# Altium PCB Joystick.PcbDoc
Units mm, origin at the board's own origin, x right, y up, seen from the top; angles counter-clockwise.
Board outline 200 x 100 mm, 2 copper layers (Top Layer, Bottom Layer); 84 components, 70 nets, 420 pads, 0 vias.
Unrouted connection lines stored in the file: 5.
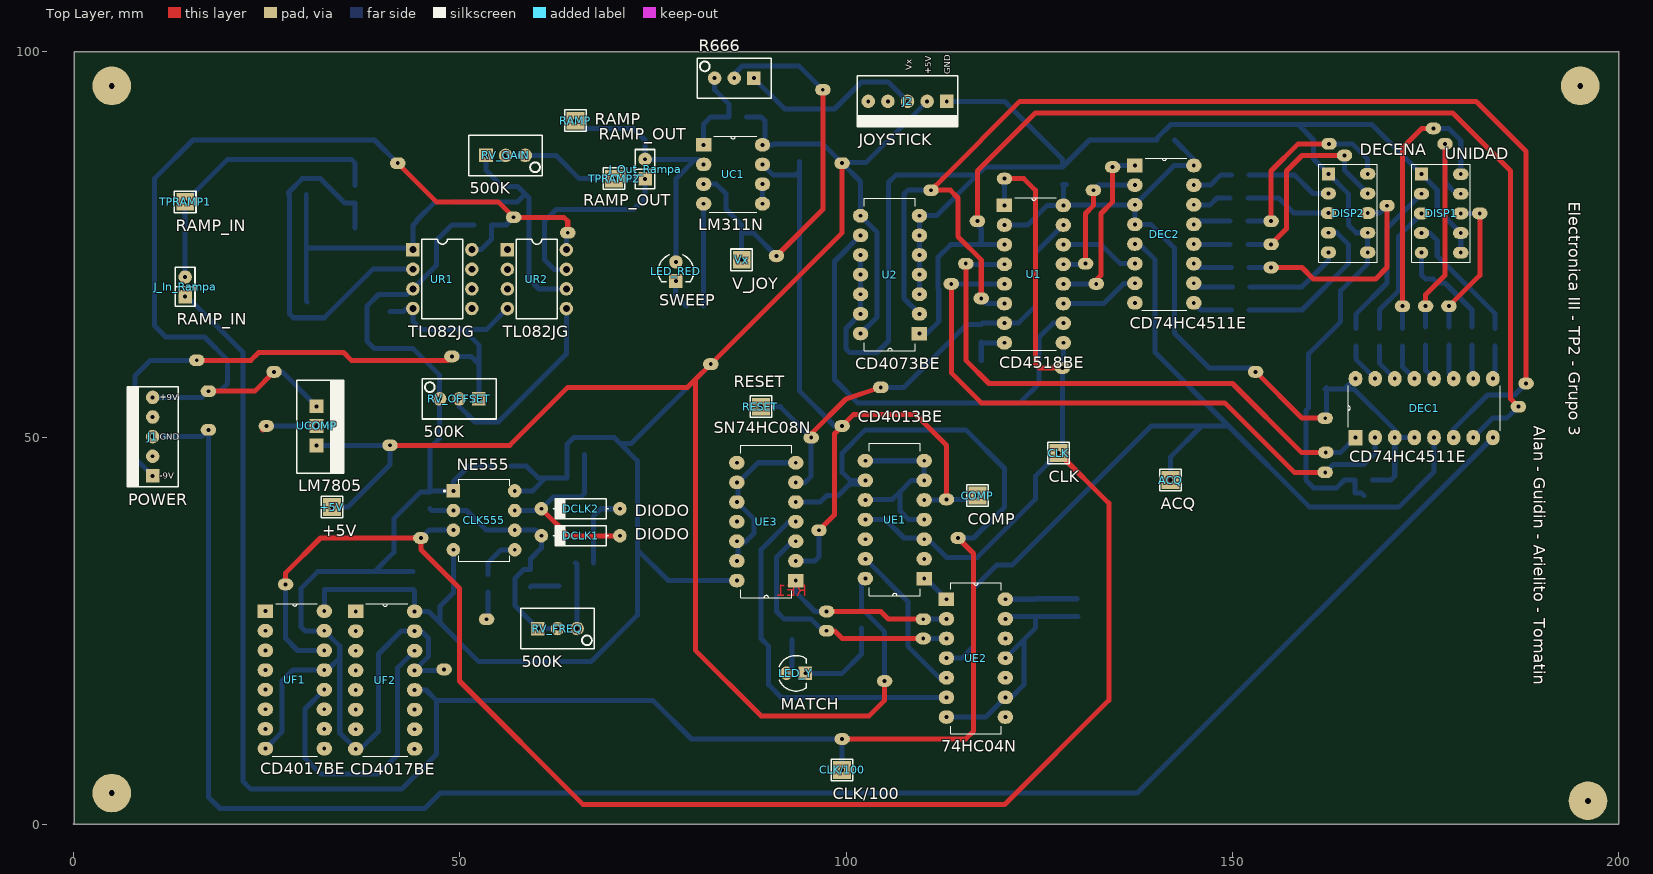
[diagram p0: Top Layer view]
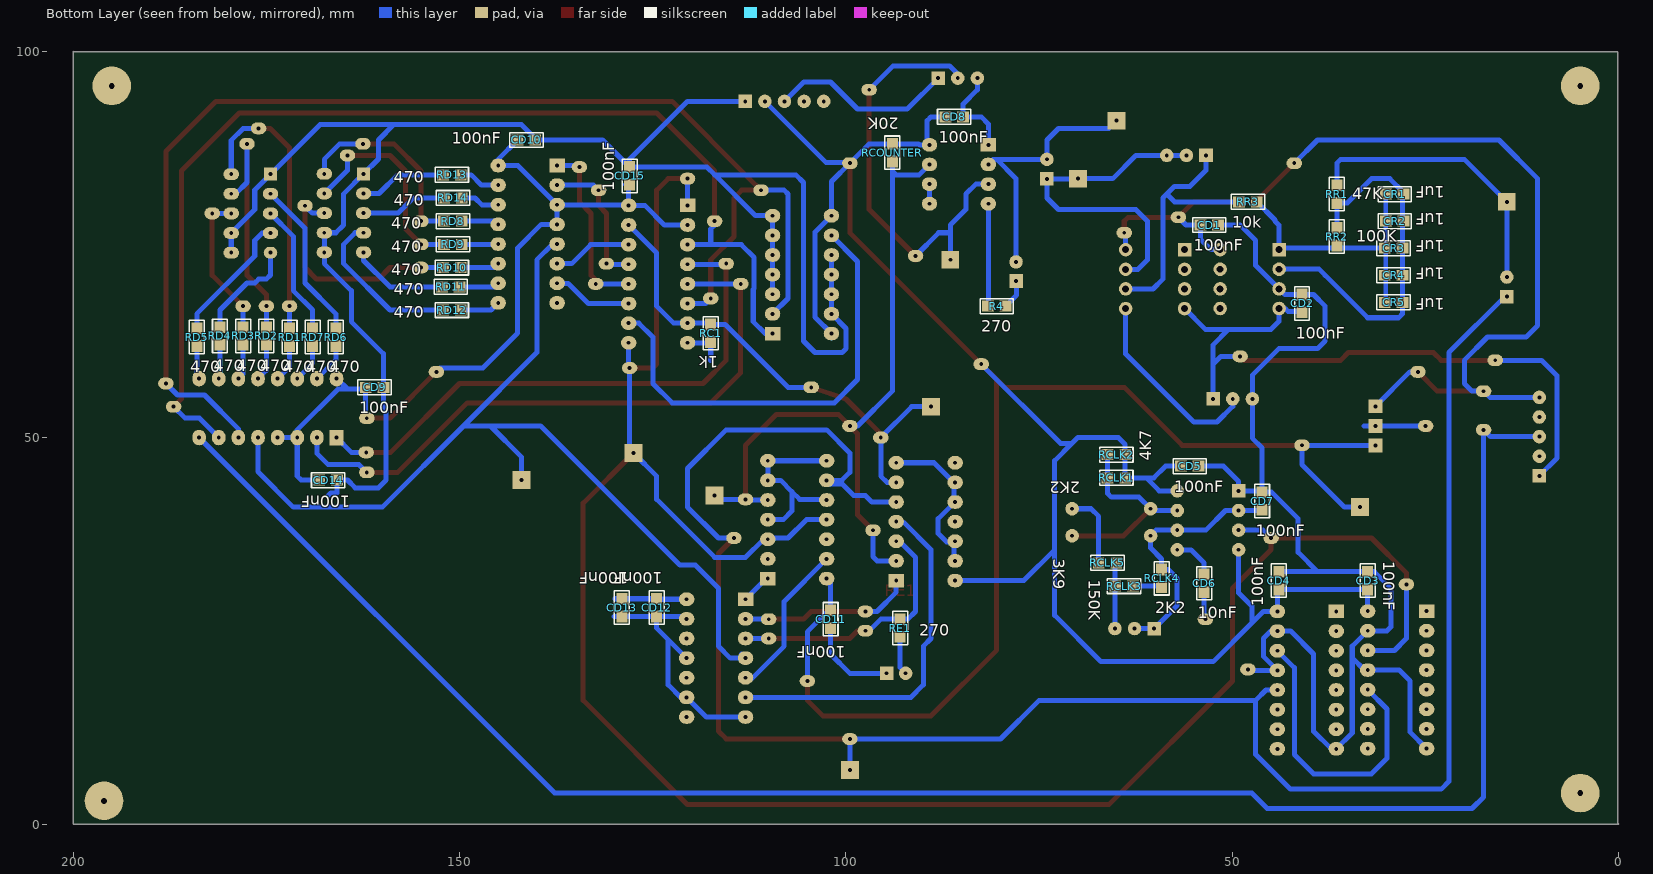
[diagram p1: Bottom Layer view, seen from below]

## Layer stack, top to bottom
Top Solder: solder mask 0.0102, Solder Resist, Dk 3.5
Top Layer: signal copper 0.0356
Dielectric 1: dielectric 0.32, FR-4, Dk 4.8
Bottom Layer: signal copper 0.0356
Bottom Solder: solder mask 0.0102, Solder Resist, Dk 3.5

## Board outline
200,0 200,100 199.949,99.949 0.127,99.949 0.127,0.127 0,0

## Design rules (kind name [scope] priority, off if disabled: settings)
Clearance polygon_Clearance [InPolygon] p1: gap=0.4 ignorepadtopadclearanceinfootprint=FALSE
Clearance [All] p2: gap=0.4 ignorepadtopadclearanceinfootprint=FALSE
PolygonConnect [All] p1: connectstyle=Relief reliefconductorwidth=0.254 reliefentries=4 polygonreliefangle="90 Angle" airgapwidth=0.254
RoutingVias [All] p1: holewidth=0.5 width=2 viastyle="Through Hole" minholewidth=0.5 minwidth=2 maxholewidth=0.5 maxwidth=2
SolderMaskExpansion [All] p1: expansion=0.102
Width [All] p1: maxlimit=0.7 minlimit=0.6 preferedwidth=0.65
30 further rules are at their usual default settings.

## Classes and differential pairs
component class Main: +5V ACQ CLK CLK/100 COMP J1 J2 LED_RED R4 R666 RAMP RESET Vx
component class U_99Counter: CD14 CD15 RC1 U1 U2
component class U_bcd2seven+display: CD9 CD10 DEC1 DEC2 DISP1 DISP2 RD1 RD2 RD3 RD4 RD5 RD6 RD7 RD8 RD9 RD10 RD11 RD12 RD13 RD14
component class U_ClockGen: CD5 CD6 CD7 CLK555 DCLK1 DCLK2 RCLK1 RCLK2 RCLK3 RCLK4 RCLK5 RV_FREQ
component class U_Comparator: CD8 RCOUNTER UC1
component class U_EdgeDetector: CD11 CD12 CD13 LED_Y RE1 UE1 UE2 UE3
component class U_FrequencyDivider: CD3 CD4 UF1 UF2
component class U_InputDriver: UCOMP
component class U_Rampa: CD1 CD2 CR1 CR2 CR3 CR4 CR5 J_In_Rampa J_Out_Rampa RR1 RR2 RR3 RV_GAIN RV_OFFSET TPRAMP1 TPRAMP2 UR1 UR2

## Components (designator, comment, footprint, x,y, rotation, side; value= is the part's Value field where it differs from the comment)
+5V "+5V" TPTH 33.5,41 r0 top
ACQ "ACQ" TPTH 142,44.5 r0 top
CD1 "100nF" 0805 53,77.5 r180 bottom
CD2 "100nF" 0805 41,67.357 r90 bottom
CD3 "100nF" 0805 32.5,31.5 r270 bottom
CD4 "100nF" 0805 44,31.5 r270 bottom
CD5 "100nF" 0805 55.526,46.29 r180 bottom
CD6 "10nF" 0805 53.669,31.147 r270 bottom
CD7 "100nF" 0805 46.169,41.79 r90 bottom
CD8 "100nF" 0805 86,91.5 r180 bottom
CD9 "100nF" 0805 161,56.5 r180 bottom
CD10 "100nF" 0805 141.357,88.5 r180 bottom
CD11 "100nF" 0805 102,26.5 r270 bottom
CD12 "100nF" 0805 124.5,28 r270 bottom
CD13 "100nF" 0805 129,28 r270 bottom
CD14 "100nF" 0805 167,44.5 r180 bottom
CD15 "100nF" 0805 128,83.857 r90 bottom
CLK "CLK" TPTH 127.5,48 r0 top
CLK555 "NE555" *DIP794W45P254L1060H508Q8 53.169,39.29 r0 top
CLK/100 "CLK/100" TPTH 99.5,7 r0 top
COMP "COMP" TPTH 117,42.5 r0 top
CR1 "1uF" 0805 29,81.5 r0 bottom
CR2 "1uF" 0805 29,78 r0 bottom
CR3 "1uF" 0805 29.143,74.5 r0 bottom
CR4 "1uF" 0805 29.143,71 r0 bottom
CR5 "1uF" 0805 29.143,67.5 r0 bottom
DCLK1 "DIODO" DO41 65.669,37.29 r180 top
DCLK2 "DIODO" DO41 65.669,40.79 r180 top
DEC1 "CD74HC4511E" *DIP254P762X508-16 183.7,57.62 r90 top
DEC2 "CD74HC4511E" *DIP254P762X508-16 145,67.42 r0 top
DISP1 "UNIDAD" "DISPLAY_LED_0.3\""#1 177,79 r0 top
DISP2 "DECENA" "DISPLAY_LED_0.3\""#2 164.96,79.04 r0 top
J1 "POWER" MOLEX5 10.294,45.04 r90 top
J2 "JOYSTICK" MOLEX5 113.04,93.5 r180 top
J_In_Rampa "RAMP_IN" JUMPER2 14.5,69.5 r90 top
J_Out_Rampa "RAMP_OUT" JUMPER2 74,84.73 r90 top
LED_RED "SWEEP" LED3 78,71.5 r270 top
LED_Y "MATCH" LED3 93.5,19.5 r0 top
R4 "270" 0805 80.5,67 r0 bottom
R666 "PRESET" "PRESET V" 85.54,96.5 r180 top
RAMP "RAMP" TPTH 65,91 r0 top
RC1 "1k" 0805 117.5,63.5 r90 bottom
RCLK1 "2K2" 0805 65.026,44.79 r180 bottom
RCLK2 "4K7" 0805 65.026,47.79 r0 bottom
RCLK3 "150K" 0805 64.026,30.79 r180 bottom
RCLK4 "2K2" 0805 59.169,31.79 r90 bottom
RCLK5 "3K9" 0805 66.169,33.79 r180 bottom
RCOUNTER "20K" 0805 94,86.857 r270 bottom
RD1 "470" 0805 172,63 r90 bottom
RD2 "470" 0805 175,63.143 r90 bottom
RD3 "470" 0805 178,63.143 r90 bottom
RD4 "470" 0805 181,63.143 r90 bottom
RD5 "470" 0805 184,63 r90 bottom
RD6 "470" 0805 166,63 r90 bottom
RD7 "470" 0805 169,63 r90 bottom
RD8 "470" 0805 150.857,78 r0 bottom
RD9 "470" 0805 150.857,75 r0 bottom
RD10 "470" 0805 151,72 r0 bottom
RD11 "470" 0805 151.143,69.5 r0 bottom
RD12 "470" 0805 151,66.5 r0 bottom
RD13 "470" 0805 151,84 r0 bottom
RD14 "470" 0805 150.857,81 r0 bottom
RE1 "270" 0805 93,25.357 r90 bottom
RESET "RESET" TPTH 89,54 r0 top
RR1 "47K" 0805 36.5,81.5 r270 bottom
RR2 "100K" 0805 36.5,76 r270 bottom
RR3 "10k" 0805 48,80.5 r0 bottom
RV_FREQ "500K" "PRESET V" 62.669,25.29 r0 top
RV_GAIN "500K" "PRESET V" 55.96,86.5 r0 top
RV_OFFSET "500K" "PRESET V" 49.96,55 r180 top
TPRAMP1 "RAMP_IN" TPTH 14.5,80.5 r0 top
TPRAMP2 "RAMP_OUT" TPTH 70,83.5 r90 top
U1 "CD4518BE" *DIP254P762X508-16 128.12,62.26 r0 top
U2 "CD4073BE" *DIP254P762X508-14 101.88,78.7 r180 top
UC1 "LM311N" *DIP254P762X480-8 89.198,80.253 r0 top
UCOMP "LM7805" "TO-220 V" 31.5,51.5 r270 top
UE1 "CD4013BE" *DIP254P762X508-14 102.5,47 r180 top
UE2 "74HC04N" *DIP254P762X420-14 120.62,13.84 r0 top
UE3 "SN74HC08N" *DIP254P762X508-14 85.88,46.74 r180 top
UF1 "CD4017BE" *DIP254P762X508-16 32.5,9.76 r0 top
UF2 "CD4017BE" *DIP254P762X508-16 44.186,9.72 r0 top
UR1 "TL082JG" JG008 47.778,70.509 r270 top
UR2 "TL082JG" JG008 60,70.5 r270 top
Vx "V_JOY" TPTH 86.5,73 r0 top

## Footprints (in the part's own frame and the unit in brackets; to place one, negate y for a bottom-side part, rotate by r counter-clockwise, add the part's x,y. Pads: shape width x height; smd on the part's side, far side on the other; paste and mask are expansions set on the pad)
0805 [mil] "Pasivo 0805"
  rect 60x56 smd: 1(-45,0) 2(45,0)
  silkscreen extent -85,-38 85,38, body extent -40,-25 39,25, height 15
*DIP254P762X420-14 [mm]
  rect 2x1.75 hole 0.5: 1(-7.62,15.24)
  oval 2x1.75 hole 0.5: 2(-7.62,12.7) 3(-7.62,10.16) 4(-7.62,7.62) 5(-7.62,5.08) 6(-7.62,2.54) 7(-7.62,0) 8(0,0) 9(0,2.54) 10(0,5.08) 11(0,7.62) 12(0,10.16) 13(0,12.7) 14(0,15.24)
  silkscreen extent -7.06,-2.13 -0.56,17.37
*DIP254P762X480-8 [mm]
  rect 2x1.75 hole 0.5: 1(-7.62,7.62)
  oval 2x1.75 hole 0.5: 2(-7.62,5.08) 3(-7.62,2.54) 4(-7.62,0) 5(0,0) 6(0,2.54) 7(0,5.08) 8(0,7.62)
  silkscreen extent -6.88,-1.09 -0.74,8.71
*DIP254P762X508-14 [mm]
  rect 2x1.75 hole 0.5: 1(-7.62,15.24)
  oval 2x1.75 hole 0.5: 2(-7.62,12.7) 3(-7.62,10.16) 4(-7.62,7.62) 5(-7.62,5.08) 6(-7.62,2.54) 7(-7.62,0) 8(0,0) 9(0,2.54) 10(0,5.08) 11(0,7.62) 12(0,10.16) 13(0,12.7) 14(0,15.24)
  silkscreen extent -7.11,-2.24 -0.51,17.48
*DIP254P762X508-16 [mm]
  rect 2x1.75 hole 0.5: 1(-7.62,17.78)
  oval 2x1.75 hole 0.5: 2(-7.62,15.24) 3(-7.62,12.7) 4(-7.62,10.16) 5(-7.62,7.62) 6(-7.62,5.08) 7(-7.62,2.54) 8(-7.62,0) 9(0,0) 10(0,2.54) 11(0,5.08) 12(0,7.62) 13(0,10.16) 14(0,12.7) 15(0,15.24) 16(0,17.78)
  silkscreen extent -6.73,-0.97 -0.89,18.75
*DIP794W45P254L1060H508Q8 [mm]
  rect 1.75x1.75 hole 0.5: 1(-3.97,3.81)
  round 1.75 hole 0.5: 2(-3.97,1.27) 3(-3.97,-1.27) 4(-3.97,-3.81) 5(3.97,-3.81) 6(3.97,-1.27) 7(3.97,1.27) 8(3.97,3.81)
  silkscreen extent -5.2,-5.3 3.3,5.3
"DISPLAY_LED_0.3\""#1 [mm] "TOS-3104AG-B"
  rect 1.7x1.7 hole 0.5: 1(-2.54,5.08)
  oval 2x1.524 hole 0.5: 2(-2.54,2.54) 3(-2.54,0) 4(-2.54,-2.54) 6(2.54,-5.08) 7(2.54,-2.54) 8(2.54,0) 9(2.54,2.54) 10(2.54,5.08)
  oval 1.75x1.524 hole 0.5: 5(-2.54,-5.08)
  silkscreen extent -3.8,-6.35 3.8,6.35, body extent -3.72,-6.3 3.73,6.3, height 6.1
"DISPLAY_LED_0.3\""#2 [mm] "TOS-3104AG-B"
  rect 1.7x1.7 hole 0.5: 1(-2.54,5.08)
  oval 2x1.524 hole 0.5: 2(-2.54,2.54) 3(-2.54,0) 4(-2.54,-2.54) 5(-2.54,-5.08) 6(2.54,-5.08) 7(2.54,-2.54) 8(2.54,0) 9(2.54,2.54) 10(2.54,5.08)
  silkscreen extent -3.8,-6.35 3.8,6.35, body extent -3.72,-6.3 3.73,6.3, height 6.1
DO41 [mm]
  round 1.75 hole 0.5: 1(-5.08,0) 2(5.08,0)
  silkscreen extent -3.56,-1.27 3.56,1.27, body extent -5.46,-1.19 5.46,1.37, height 2.03
JG008 [mm] "DIP; 8 Leads; Row Spacing 7.62 mm; Pitch 2.54 mm"
  rect 1.75x1.75 hole 0.9: 1(-3.81,-3.81)
  round 1.75 hole 0.9: 2(-1.27,-3.81) 3(1.27,-3.81) 4(3.81,-3.81) 5(3.81,3.81) 6(1.27,3.81) 7(-1.27,3.81) 8(-3.81,3.81)
  silkscreen extent -5.15,-2.65 5.15,2.65
JUMPER2 [mm]
  rect 1.75x1.75 hole 0.5: 1(-1.27,0)
  round 1.75 hole 0.5: 2(1.27,0)
  silkscreen extent -2.54,-1.27 2.54,1.27, body extent -2.46,-1.27 2.54,1.27, height 9.5
LED3 [mm]
  round 1.75 hole 0.5: 1(-1.219,0)
  rect 1.75x1.75 hole 0.5: 2(1.245,0)
  silkscreen extent -2.13,-2.3 1.36,2.3, body extent -1.65,-1.63 1.65,1.66, height 0.49
MOLEX5 [mm]
  rect 1.75x1.75 hole 0.5: 1(0,0)
  round 1.75 hole 0.5: 2(2.54,0) 3(5.08,0) 4(7.62,0) 5(10.16,0)
  silkscreen extent -1.4,-3.3 11.56,3.3, body extent -1.27,-3.17 11.43,3.18, height 10.74
"PRESET V" [mm]
  rect 1.75x1.75 hole 0.5: 1(-2.54,0)
  round 1.75 hole 0.5: 2(0,0) 3(2.54,0)
  silkscreen extent -4.76,-2.6 4.76,2.6, body extent -4.7,-2.42 4.83,2.42, height 11.55
"TO-220 V" [mil]
  rect 70x70 hole 19.68: 1(-100,0) 2(0,0) 3(100,0)
  silkscreen extent -232,-100 240,139, body extent -197,-79 197,118, height 709
TPTH [mm]
  rect 2.3x2.3 hole 0.5: 1(0,0)
  silkscreen extent -1.4,-1.4 1.4,1.4, body extent -1.27,-1.27 1.27,1.27, height 6.04

## Part data
+5V ACQ CLK CLK/100 COMP RAMP RESET TPRAMP1 TPRAMP2 Vx: library part TP
CD1 CD2 CD3 CD4 CD5 CD6 CD7 CD8 CD9 CD10 CD11 CD12 CD13 CD14 CD15 CR1 CR2 CR3 CR4 CR5: library part CAP
CLK555: Package="SOIC-8 Conrad", Availability=Unavailable, MF="Texas Instruments", MP=NE555, Price=None, SnapEDA_Link=https://www.snapeda.com/parts/NE555/Texas%20Instruments/view-part/?ref=snap
DEC1 DEC2: "High Speed CMOS Logic BCD-to-7 Segment Latch/Decoder/Driver 16-PDIP -55 to 125", Package="PDIP-16 Texas Instruments", Digi-Key_Part_Number=296-14537-5-ND, Digi-Key_Purchase_URL=https://www.digikey.com/product-detail/en/texas-instruments/CD74HC4511E/296-14537-5-ND/555825?utm_source=snapeda&utm_medium=aggregator&utm_campaign=symbol, MF="Texas Instruments", MP=CD74HC4511E, SnapEDA_Link=https://www.snapeda.com/parts/CD74HC4511E/Texas%20Instruments/view-part/?ref=snap
DISP1 DISP2: library part "DISPLAY 7SEG K", "Display 7 Segmentos Catodo Común"
J1 J2: library part MOLEX5
J_In_Rampa J_Out_Rampa: library part JUMPER
LED_RED LED_Y: library part LED
R4 RC1 RCLK1 RCLK2 RCLK3 RCLK4 RCLK5 RCOUNTER RD1 RD2 RD3 RD4 RD5 RD6 RD7 RD8 RD9 RD10 RD11 RD12 RD13 RD14 RE1 RR1 RR2 RR3: library part RES
RV_FREQ RV_GAIN RV_OFFSET: library part PRESET
U1: Package="DIP-16 RCA", Availability=Unavailable, MF="Texas Instruments", MP=CD4518BE, Price=None, SnapEDA_Link=https://www.snapeda.com/parts/CD4518BE/Texas%20Instruments/view-part/?ref=snap
U2: "IC: digital; AND; Channels: 3; Inputs: 3; CMOS; THT; DIP1", Package="DIP-14 Texas Instruments", Availability=Unavailable, MF="Texas Instruments", MP=CD4073BE, Price=None, SnapEDA_Link=https://www.snapeda.com/parts/CD4073BE/Texas%20Instruments/view-part/?ref=snap
UC1: "IC VOLTAGE COMPARATOR 8-DIP", Package="DIP-8 AMD", Availability=Unavailable, MF="Texas Instruments", MP=LM311N, Price=None, SnapEDA_Link=https://www.snapeda.com/parts/LM311N/Texas%20Instruments/view-part/?ref=snap
UCOMP: Package="TO-220 Texas Instruments", Availability=Unavailable, MF="Texas Instruments", MP=LM7805, Price=None, SnapEDA_Link=https://www.snapeda.com/parts/LM7805/Texas%20Instruments/view-part/?ref=snap
UE1: "Flip Flop D-Type Pos-Edge 2-Element 14-Pin PDIP", Package="DIP-14 RCA", Availability=Unavailable, MF=Texas, MP=CD4013BE, Price=None, SnapEDA_Link=https://www.snapeda.com/parts/CD4013BE/Texas%20Instruments/view-part/?ref=snap
UE2: "Inverter 6-Element CMOS 14-Pin PDIP Inverter 6-Element CMOS 14-Pin PDIP", Package="DIP-14 NXP Semiconductors", Availability=Unavailable, MF="Texas Instruments", MP=74HC04N, Price=None, SnapEDA_Link=https://www.snapeda.com/parts/74HC04N/Texas%20Instruments/view-part/?ref=snap
UE3: "AND Gate 4-Element 2-IN CMOS 14-Pin PDIP Tube", Package="PDIP-14 Signetics", Availability=Unavailable, MF="Texas Instruments", MP=SN74HC08N, Price=None, SnapEDA_Link=https://www.snapeda.com/parts/SN74HC08N/Texas%20Instruments/view-part/?ref=snap
UF1 UF2: "IC Mos 4017/CD4017BE HARRIS", Package="DIP-16 Intersil", Availability=Unavailable, MF=Texas, MP=CD4017BE, Price=None, SnapEDA_Link=https://www.snapeda.com/parts/CD4017BE/Texas%20Instruments/view-part/?ref=snap
UR1 UR2: "JFET-Input Operational Amplifier", ComponentLink1Description="Manufacturer Link", ComponentLink1URL=http://www.ti.com/, ComponentLink2Description=Datasheet, ComponentLink2URL=http://www-s.ti.com/sc/ds/tl082.pdf, DatasheetVersion=Feb-1999, LatestRevisionDate=04-Mar-2005, LatestRevisionNote="Stylized 3D Model Added.", PackageDescription="DIP; 8 Leads; Row Spacing 7.62 mm; Pitch 2.54 mm", PackageReference=JG008, PackageVersion=Jan-1995, Published=16-Jan-2001, Publisher="Altium Limited"

## Free pads (board coordinates)
  oval 2x1.524 hole 0.5: 2(155,78) 3(155,75) 4(155,72) 5(155,72) 6(155,75) 7(155,78) 9(162.5,88) 10(164.5,86.5) 11(164.5,86.5) 12(162.5,88) 13(162.5,88) 14(172,67) 15(178,67) 16(175,67) 17(182,79) 18(177.5,88) 19(176,90) 20(177.5,88) 21(176,90) 22(170,80) 23(170,80) 24(111,82) 26(117.5,68) 27(117.5,68) 28(111,82) 29(97.5,27.5) 30(97.5,27.5) 31(110,26.5) 32(110,24) 33(97.5,25) 34(97.5,25) 36(132,82) 37(132,82) 38(131,72.5) 39(131,72.5) 40(134.5,85) 41(132.38,69.88) 43(132.38,69.88) 47(113.62,69.88) 48(115.5,72.5) 49(120.5,83.5) 50(162.08,48.08) 52(128,59) 53(128,59) 54(45,37) 55(27.5,31) 56(53.5,26.5) 57(48,20) 58(104.5,56.5) 59(162,45.5) 60(162,45.5) 61(96.5,38) 62(113,42) 63(113,42) 69(114.5,37) 70(99.5,11) 71(99.5,11) 72(25,51.5) 73(26,58.5) 74(41,49) 75(17.5,56) 76(17.5,51) 78(16,60) 79(49,60.5) 80(95.5,50) 81(95.5,50) 82(99.5,51.5) 83(99.5,51.5) 84(97,95) 85(91,73.5) 86(91,73.5) 87(97,95) 88(57,78.5) 89(57,78.5) 90(42,85.5) 91(64,76.5) 92(64,76.5) 93(57,78.5) 94(82.5,59.5) 95(153,58.5) 96(162,52.5) 97(153,58.5) 98(162,52.5) 99(188,57) 100(188,57) 101(117,78) 102(187,54) 103(99.5,85.5) 104(105,18.5)
  round 5 hole 0.762: 105(196,3) 106(195,95.5) 107(5,95.5) 108(5,4)

## Nets (pads, with @x,y where several pads share a name; then routed paths per layer and width w, separated by ;. In a path a pad name is that pad's centre, name@x,y a point inside that pad or via, vN(x,y) a via of type N, cw(c..) or ccw(c..) an arc to the next point about the centre after c; other vN are vias at no path point)
5V: +5V.1 CD3.2 CD4.2 CD5.1 CD8.1 CD9.1 CD10.1 CD11.1 CD12.1 CD13.1 CD14.1 CD15.1 CLK555.4 CLK555.8 DEC1.3 DEC1.4 DEC1.16 DEC2.3 DEC2.4 DEC2.16 J2.2 pad.74 pad.94 pad.95 pad.96 pad.97 pad.98 pad.103 pad.104 RCLK1.2 RCLK2.1 RCOUNTER.1 U1.2 U1.16 U2.8 U2.14 UC1.8 UCOMP.3 UE1.14 UE2.14 UE3.14 UF1.16 UF2.16 | length 496.1
  Top Layer w0.65: pad.74 56.5,49 64,56.5 79.5,56.5 80.5,57.5 ; pad.103 99.5,76.5 pad.94 80.5,57.5 ; pad.104 105,16 103,14 89,14 80.5,22.5 80.5,57.5 ; pad.97 159,52.5 pad.98
  Bottom Layer w0.65: UCOMP.3 40.96,48.96 pad.74 41,46.5 35.5,41 +5V.1 ; UF1.16 CD3.2 CD4.2 44.186,30.171 UF2.16 46,27.5 47.5,26 ; CLK555.4 49.199,29.897 47.5,28.199 47.5,26 ; CD5.1 58.669,46.29 60.169,44.79 61.169,44.79 ; CLK555.8 59.479,43.1 61.169,44.79 ; pad.94 72.226,49.226 70.774,49.226 ; UE3.14 77,31.5 73,35.5 ; CD8.1 89,91.5 89.5,91 89.5,88.175 UC1.8 90.5,87.873 90.627,88 RCOUNTER.1 97,88 pad.103@99.44,85.56 ; U2.14@101.88,62.88 U2.14 104,65.58 104,76.58 U2.8 101.88,83.12 pad.103@99.44,85.56 ; UE1.14 102,31.26 CD11.1 102.213,27.643 105,24.856 pad.104 ; J2.2 102.56,85.56 pad.103@99.44,85.56 ; U1.2@120.338,77.5 U1.2 123.5,77.5 126.04,80.04 U1.16 ; UE2.14 124.437,29.08 CD12.1 CD13.1 129.857,29.143 ; CD15.1 128.5,82.714 128.12,82.594 U1.16 ; CD10.1 145,86 DEC2.16 142.46,85.2 DEC2.3 ; pad.97 152.5,59 147,59 142.5,63.5 142.5,74.5 139.42,77.58 DEC2.4 DEC2.3 ; pad.98 162.143,52.643 CD9.1@162.143,56.286 ; CD9.1@162,56.286 CD9.1@162.143,56.286 ; CD9.1 CD9.1@162.143,56.286 ; DEC1.16 165.834,57.62 164.5,56.286 ; CD14.1 170.5,44.5 171,45 DEC1.3 ; DEC1.4 DEC1.3 ; 47.5,26 52.5,21 67,21 73,27 73,35.5 ; 61.169,44.79 RCLK1.2 RCLK2.1 63.883,49.109 64.774,50 70,50 70.774,49.226 ; 70.774,49.226 73,47 73,35.5 ; U1.16 128.2,80.12 DEC2.3 ; CD9.1@162.143,56.286 164.5,56.286 ; 164.5,56.286 165.714,56.286 171,51 DEC1.3
+9V: CD1.1 J1.5 pad.73 pad.75 pad.88 pad.89 pad.90 pad.91 pad.92 pad.93 UCOMP.1 UR1.8 UR2.8 | length 132.6
  Top Layer w0.65: pad.75 23.5,56 pad.73 ; pad.90 47,80.5 55,80.5 pad.93 63.5,78.5 64,78 pad.92
  Bottom Layer w0.65: J1.5 16.7,55.2 pad.75 19,56 20,57 20,60 17,63 12,63 10.5,64.5 10.5,83.5 15.5,88.5 39,88.5 pad.90 ; pad.73 27.04,58.5 UCOMP.1 ; UR1.8 52.819,74.319 54.143,75.643 CD1.1 56,77.5 pad.93 ; UR2.8 63.81,76.31 pad.92
-9V: CD2.1 J1.1 pad.78 pad.79 RV_OFFSET.1 UR1.4 UR2.4 | length 89.1
  Top Layer w0.65: pad.78 23,60 24,61 35,61 36,60 48.5,60 pad.79
  Bottom Layer w0.65: J1.1 8,47.334 8,58 10,60 pad.78 ; CD2.1@41,66.286 42.786,66.286 43.199,66.699 UR1.4 43.968,65.032 45,64 50.5,64 ; pad.79 51.5,60.5 52.5,59.5 ; RV_OFFSET.1 52.5,59.5 ; UR2.4 53.5,64 50.5,64 ; 50.5,64 52.5,62 52.5,59.5
ACQ: ACQ.1 DEC1.5 DEC2.5 UE2.4 | length 128.9
  Bottom Layer w0.65: UE2.4@113.54,22 UE2.4 114.96,21.46 116.5,23 116.5,30.5 119.5,33.5 121.5,33.5 139.5,51.5 146,51.5 ; DEC2.5 137.96,75.04 140,73 140,61 149.5,51.5 ; ACQ.1 142,47.5 146,51.5 ; DEC1.5 176.08,45.58 171.5,41 160,41 149.5,51.5 ; 146,51.5 149.5,51.5
CLOCK: CLK555.3 CLK.1 pad.49 pad.52 pad.53 pad.54 pad.55 U1.1 U1.9 UE1.3 UE1.11 UF1.14 | length 273.5
  Top Layer w0.65: pad.55 27.5,32.5 32,37 pad.54 45,35.5 50,30.5 50,18.5 66,2.5 120.5,2.5 134,16 134,41.5 CLK.1 ; pad.49 123,83.5 124.5,82 124.5,59.5 125,59 pad.53
  Bottom Layer w0.65: pad.55 27.5,24 29.04,22.46 UF1.14 ; pad.54 46.02,38.02 CLK555.3 ; UE1.11 105.12,39.38 107.5,37 109.96,37 UE1.3 110.66,36.84 113,34.5 117,34.5 124.5,42 124.5,45 CLK.1 128,48.5 pad.53 128.12,59.12 U1.9 ; U1.1@119.96,79.5 U1.1 pad.49
CLOCK/100: CLK/100.1 J_In_Rampa.1 pad.69 pad.70 pad.71 UE1.9 UE3.5 UF2.12 | length 259
  Top Layer w0.65: pad.71@99.515,11.015 115.5,11.015 116.5,12.015 116.5,35 pad.69
  Bottom Layer w0.65: J_In_Rampa.1 14.77,68.23 22,61 22,5.5 23,4.5 42.5,4.5 47,9 47,16 ; UF2.12 45.66,17.34 47,16 ; UE3.5 96.66,41.66 97.5,42.5 99,42.5 100.5,44 102.04,44 UE1.9 100.54,44.46 99.5,45.5 99.5,48 102.5,51 115.5,51 120.5,46 120.5,41 116.5,37 pad.69 pad.69@114,37 ; CLK/100.1 pad.71 80,11 75,16 47,16
COMP: COMP.1 pad.61 pad.62 pad.63 pad.82 pad.83 RCOUNTER.2 UC1.7 UE1.5 UE3.2 | length 94.1
  Top Layer w0.65: pad.61 98.5,40 98.5,50.5 pad.83 101,53 109,53 113,49 pad.63
  Bottom Layer w0.65: UC1.7 90.531,84 93.5,84 94,84.5 ; UE3.2 95.96,34.04 96.5,34.58 96.5,37.5 pad.61@97,38 ; RCOUNTER.2 94,84.5 ; pad.83 98.5,51.5 94,56 94,84.5 ; UE1.5 112.42,41.92 pad.63 116.5,42 COMP.1
GND: CD1.2 CD2.2 CD3.1 CD4.1 CD5.2 CD6.2 CD7.2 CD8.2 CD9.2 CD10.2 CD11.2 CD12.2 CD13.2 CD14.2 CD15.2 CLK555.1 DEC1.8 DEC2.8 DISP1.1 DISP1.6 DISP1.7 DISP2.1 DISP2.6 DISP2.7 J1.3 J2.1 LED_Y.2 pad.56 pad.57 pad.72 pad.76 R4.2 R666.3 RC1.1 RV_OFFSET.3 U1.8 U2.3 U2.4 U2.5 U2.6 U2.7 U2.10 U2.11 U2.12 U2.13 UC1.1 UC1.4 UCOMP.2 UE1.4 UE1.6 UE1.7 UE1.8 UE1.10 UE2.7 UE2.9 UE2.11 UE2.13 UE3.7 UE3.9 UE3.10 UE3.12 UE3.13 UF1.8 UF1.13 UF1.15 UF2.8 UF2.13 UF2.15 UR1.3 | length 771.8
  Top Layer w0.65: pad.72@24.5,51 pad.72
  Bottom Layer w0.65: J1.3 16.62,50.12 pad.76 17.5,3.5 19,2 45.5,2 47.5,4 137.7,4 DEC1.8 ; UF1.8 27,11.88 27,18.5 28.42,19.92 UF1.13 32.92,19.92 34.5,21.5 ; pad.72 UCOMP.2 33,51.5 ; CD4.1 39,32.643 ; pad.57 47.88,19.88 UF2.13 46,21.694 46,24 45.04,24.96 UF2.15 42.46,24.96 39.5,22 39.5,12 37.22,9.72 UF2.8 34.5,11.786 34.5,21.5 ; CD1.2 49,77.5 47,75.5 47,72.271 UR1.3 43.229,68.5 CD2.2 39.5,68.5 38,67 38,62.5 39,61.5 44,61.5 47.42,58.08 RV_OFFSET.3 47.42,49.92 46.169,48.669 CD7.2 ; pad.56@53.5,27 53.669,27.169 CD6.2 ; CD5.2 51.169,46.29 49.199,44.32 CLK555.1 46.336,43.1 CD7.2 ; R4.2@81.578,67 UC1.4 ; UC1.1 81.578,90.578 82.5,91.5 CD8.2 84.857,93.143 83,95 R666.3 ; UE3.13@86,33.96 86,36.5 87,36.5 88.08,37.58 88.08,39.5 86,41.58 86,44.12 88.62,46.74 UE3.7 ; LED_Y.2 99.5,19.5 102,22 CD11.2 ; U2.10 U2.11 U2.12 U2.13 100,64.12 100,61.5 100.5,61 104,61 105.5,62.5 105.5,83 106.5,84 117,84 ; UE1.8@102.16,46.66 UE1.8 UE1.7 UE1.6 108.46,44.46 107,43 ; UE1.10 102.58,42 106,42 107,43 ; U2.3 U2.4 U2.5 U2.6 U2.7 111.7,78.7 117,84 ; UE1.4 108.12,39.38 107,40.5 107,43 ; UE2.7 118.08,13.84 UE2.9 121.38,16.38 123,18 123,23.84 ; J2.1 120.5,93.5 128,86 CD15.2 ; 117.5,60 RC1.1 117.597,62.26 U1.8 ; UE2.11 123,23.84 ; UE2.13 120.937,26.857 CD12.2 ; 130,26.857 CD13.2 CD12.2 ; 167,42.5 166.643,42.857 165.857,42.857 CD14.2 164.5,44.5 163.5,43.5 160.5,43.5 159.5,44.5 159.5,53.5 159.857,53.857 CD9.2 159.857,60.857 164,65 164,69 167.5,72.5 DISP2.6 DISP2.7 166,76.5 165,77.5 165,81.54 DISP2.1 160.5,86.04 160.5,88.5 158.5,90.5 ; DISP1.6 DISP1.7 176.5,79.5 176.5,82.04 DISP1.1 168.04,90.5 158.5,90.5 ; 34.5,21.5 34.5,23 UF1.15 30,25 29.5,25.5 29.5,30.5 31.643,32.643 CD3.1 39,32.643 ; 39,32.643 41.5,35.143 41.5,39.5 44.933,42.933 CD7.2 ; 117,84 118,85 CD15.2 ; 123,23.84 124.5,25.34 CD12.2 ; CD15.2 131.5,88.5 CD10.2 140.214,88.713 142.001,90.5 158.5,90.5
NetCD6_1: CD6.1 CLK555.5 | length 5.7
  Bottom Layer w0.65: CD6.1 53.669,33.79 55.359,35.48 CLK555.5
NetCD7_1: CD7.1 CLK555.2 CLK555.6 DCLK1.2 RCLK4.2 RV_FREQ.1 RV_FREQ.2 | length 33.6
  Bottom Layer w0.65: CD7.1@46.169,40.79 46.399,40.56 CLK555.2 50.899,40.56 53.439,38.02 CLK555.6 59.859,38.02 DCLK1.2 60.589,35.71 59.169,34.29 RCLK4.2 58.312,32.933 57.169,31.79 57.169,28.25 RV_FREQ.1 RV_FREQ.2
NetCLK555_7: CLK555.7 DCLK1.1 DCLK2.2 RCLK1.1 RCLK2.2 | length 26.6
  Top Layer w0.65: DCLK2.2 64.089,37.29 DCLK1.1
  Bottom Layer w0.65: CLK555.7 60.359,40.56 DCLK2.2 62.089,42.29 65.669,42.29 66.169,42.79 RCLK1.1 RCLK2.2
NetCR1_1: CR1.1 CR2.1 CR3.1 CR4.1 CR5.1 RR1.2 RR2.1 UR1.2 | length 48.4
  Bottom Layer w0.6: CR1.1 28,81.357 CR3.1 CR4.1 CR5.1
  Bottom Layer w0.65: CR1.1 27.857,81.713 29.644,83.5 32,83.5 35.143,80.357 RR1.2 RR2.1 ; CR5.1 28,66 28.5,65.5 32.5,65.5 34,67 38,71 38.779,71.779 UR1.2
NetCR1_2: CR1.2 CR2.2 CR3.2 CR4.2 CR5.2 RR2.2 RR3.1 UR1.1 | length 35.3
  Bottom Layer w0.6: CR1.2 CR2.2 30.143,74.5 30.143,67.643 CR5.2
  Bottom Layer w0.65: CR3.2@30.143,74.5 CR3.2 43.787,74.5 UR1.1 43.968,77.468 44.5,78 44.5,78.143 RR3.1
NetDCLK2_1: DCLK2.1 RCLK5.1 | length 9.9
  Bottom Layer w0.65: RCLK5.1 67.312,39.812 68.29,40.79 DCLK2.1
NetDEC1_1: DEC1.1 pad.48 pad.50 U1.4 | length 73.8
  Top Layer w0.65: pad.48 115.5,60 118.5,57 150,57 158.92,48.08 pad.50
  Bottom Layer w0.65: pad.48 115.58,72.42 U1.4 ; pad.50@162,48 pad.50 164,48.08 DEC1.1
NetDEC1_2: DEC1.2 pad.47 pad.59 pad.60 U1.5 | length 81.6
  Top Layer w0.65: pad.47 113.62,58.38 117.5,54.5 149,54.5 158,45.5 pad.60
  Bottom Layer w0.65: pad.47 U1.5 ; pad.60 163,46.5 167,46.5 168.46,47.96 DEC1.2
NetDEC1_6: DEC1.6 pad.24 pad.26 pad.27 pad.28 pad.99 pad.100 U1.6 U2.2 | length 168.9
  Top Layer w0.65: pad.27 117.5,73 114.5,76 114.5,81 113.5,82 pad.28 112.5,83.5 122.5,93.5 181.5,93.5 188,87 pad.100
  Bottom Layer w0.65: U2.2 107.5,68 107.5,81.5 108,82 pad.28 ; pad.27 118.16,67.34 U1.6 ; DEC1.6 178.62,51.12 183,55.5 186.5,55.5 pad.100
NetDEC1_7: DEC1.7 pad.101 pad.102 U1.3 U2.1 | length 144.2
  Top Layer w0.65: pad.101 117,84.5 124.5,92 178.5,92 186,84.5 186,55 pad.102
  Bottom Layer w0.65: U2.1 110.46,63.46 112,65 112,69.159 111.895,69.264 111.895,73.315 113.54,74.96 117.5,74.96 ; pad.101 117,77.5 117.5,77 117.5,74.96 ; U1.3 117.5,74.96 ; DEC1.7 183.66,52.5 185.5,52.5 pad.102
NetDEC1_9: DEC1.9 RD5.1 | length 4.4
  Bottom Layer w0.65: DEC1.9 184,57.92 RD5.1
NetDEC1_10: DEC1.10 RD4.1 | length 4.4
  Bottom Layer w0.65: RD4.1 181,57.78 DEC1.10
NetDEC1_11: DEC1.11 RD3.1 | length 4.6
  Bottom Layer w0.65: RD3.1 178,58.24 DEC1.11
NetDEC1_12: DEC1.12 RD2.1 | length 4.8
  Bottom Layer w0.65: RD2.1 175,58.7 DEC1.12
NetDEC1_13: DEC1.13 RD1.1 | length 4.9
  Bottom Layer w0.65: RD1.1 172,59.16 DEC1.13
NetDEC1_14: DEC1.14 RD7.1 | length 5.1
  Bottom Layer w0.65: RD7.1 169,59.62 DEC1.14
NetDEC1_15: DEC1.15 RD6.1 | length 5.3
  Bottom Layer w0.65: RD6.1 166,60.08 DEC1.15
NetDEC2_1: DEC2.1 pad.40 pad.41 pad.43 U1.12 | length 23.4
  Top Layer w0.65: pad.43 132.38,70.38 133,71 133,79 134.5,80.5 pad.40
  Bottom Layer w0.65: U1.12 pad.43 ; pad.40@134.2,85.2 DEC2.1
NetDEC2_2: DEC2.2 pad.36 pad.37 pad.38 pad.39 U1.13 | length 17.9
  Top Layer w0.65: pad.39 131,79 132,80 pad.37
  Bottom Layer w0.65: U1.13 pad.39@130.5,72.42 ; pad.37 132.66,82.66 DEC2.2
NetDEC2_6: DEC2.6 U1.14 | length 10.3
  Bottom Layer w0.65: U1.14 133.04,74.96 135.5,72.5 DEC2.6
NetDEC2_7: DEC2.7 U1.11 | length 10.3
  Bottom Layer w0.65: U1.11 133.34,67.34 135.96,69.96 DEC2.7
NetDEC2_9: DEC2.9 RD12.1 | length 5.2
  Bottom Layer w0.65: DEC2.9 145.92,66.5 RD12.1
NetDEC2_10: DEC2.10 RD11.1 | length 5.2
  Bottom Layer w0.65: DEC2.10 145.46,69.5 RD11.1
NetDEC2_11: DEC2.11 RD10.1 | length 5.1
  Bottom Layer w0.65: DEC2.11 145.5,72 RD10.1
NetDEC2_12: DEC2.12 RD9.1 | length 4.7
  Bottom Layer w0.65: DEC2.12 145.04,75 RD9.1
NetDEC2_13: DEC2.13 RD8.1 | length 4.9
  Bottom Layer w0.65: DEC2.13 145.42,78 RD8.1
NetDEC2_14: DEC2.14 RD14.1 | length 5.1
  Bottom Layer w0.65: DEC2.14 147.12,80.12 148,81 RD14.1
NetDEC2_15: DEC2.15 RD13.1 | length 5.4
  Bottom Layer w0.65: DEC2.15 147.16,82.66 148.5,84 RD13.1
NetDISP1_2: DISP1.2 RD6.2 | length 20.9
  Bottom Layer w0.65: RD6.2 166,66 170,70 170,77.08 DISP1.2
NetDISP1_3: DISP1.3 RD7.2 | length 17.1
  Bottom Layer w0.65: RD7.2 169,66.5 171.5,69 171.5,76.04 DISP1.3
NetDISP1_4: DISP1.4 RD5.2 | length 16.9
  Bottom Layer w0.65: DISP1.4 175.54,76.46 176.5,75.5 176.5,73.5 184,66 RD5.2
NetDISP1_5: DISP1.5 RD4.2 | length 13.5
  Bottom Layer w0.65: DISP1.5 174.46,71.04 175,70.5 176,70.5 176.5,70 177.5,70 181,66.5 RD4.2
NetDISP1_8: DISP1.8 pad.15 pad.17 RD3.2 | length 18.3
  Top Layer w0.65: pad.15 182,71 pad.17@182,78.5
  Bottom Layer w0.65: RD3.2 pad.15 ; DISP1.8 pad.17
NetDISP1_9: DISP1.9 pad.16 pad.18 pad.20 RD2.2 | length 32.4
  Top Layer w0.65: pad.16 175,68.5 177.5,71 pad.20
  Bottom Layer w0.65: RD2.2 175,66.5 pad.16 ; pad.20 177.5,83 178.96,81.54 DISP1.9
NetDISP1_10: DISP1.10 pad.14 pad.19 pad.21 RD1.2 | length 37
  Top Layer w0.65: pad.14 172,87.5 174.5,90 pad.21
  Bottom Layer w0.65: RD1.2 172,66.5 pad.14 ; pad.21 178,90 179.54,88.46 DISP1.10
NetDISP2_2: DISP2.2 RD13.2 | length 11.3
  Bottom Layer w0.65: RD13.2 158,84 160.42,81.58 DISP2.2
NetDISP2_3: DISP2.3 RD14.2 | length 11.2
  Bottom Layer w0.65: RD14.2 156,81 157.96,79.04 DISP2.3
NetDISP2_4: DISP2.4 RD12.2 | length 21
  Bottom Layer w0.65: RD12.2 159,66.5 165,72.5 165,75 163.5,76.5 DISP2.4
NetDISP2_5: DISP2.5 RD11.2 | length 12.6
  Bottom Layer w0.65: RD11.2 159,69.5 162.42,72.92 DISP2.5
NetDISP2_8: DISP2.8 pad.4 pad.5 pad.22 pad.23 RD10.2 | length 29.5
  Top Layer w0.65: pad.5 159,72 160.5,70.5 168.5,70.5 170,72 pad.23
  Bottom Layer w0.65: RD10.2 pad.5@154.5,72 ; DISP2.8 169.04,79.04 pad.23
NetDISP2_9: DISP2.9 pad.3 pad.6 pad.10 pad.11 RD9.2 | length 26.8
  Top Layer w0.65: pad.6 157,77 157,84.5 159,86.5 pad.11@164,86.5
  Bottom Layer w0.65: RD9.2 pad.6@154.5,75 ; pad.11 164.5,84.58 DISP2.9
NetDISP2_10: DISP2.10 pad.2 pad.7 pad.9 pad.12 pad.13 RD8.2 | length 25.7
  Top Layer w0.65: pad.7 155,84.5 158.5,88 pad.13
  Bottom Layer w0.65: RD8.2 pad.7@154.5,78 ; pad.13 165.5,88 167.5,86 DISP2.10
NetJ2_3: J2.3 R666.1 | length 24
  Bottom Layer w0.65: R666.1 92.08,92.5 98.5,92.5 102,96 105.46,96 J2.3
NetJ_In_Rampa_2: J_In_Rampa.2 RR1.1 TPRAMP1.1 | length 37.1
  Bottom Layer w0.65: J_In_Rampa.2 TPRAMP1.1 20,86 36,86 36.5,85.5 RR1.1
NetJ_Out_Rampa_1: J_Out_Rampa.1 RV_GAIN.2 RV_GAIN.3 TPRAMP2.1 UR2.7 | length 44.3
  Bottom Layer w0.65: RV_GAIN.2 RV_GAIN.3 62.5,86.5 65.5,83.5 TPRAMP2.1 70.04,83.46 J_Out_Rampa.1 74,81 72.5,79.5 62.5,79.5 61,78 61,73 62.23,71.77 UR2.7
NetLED_RED_2: LED_RED.2 R4.1 | length 3.9
  Bottom Layer w0.65: LED_RED.2 77.919,70.174 77.919,68.438 R4.1
NetLED_Y_1: LED_Y.1 RE1.1 | length 4.7
  Bottom Layer w0.65: LED_Y.1 93,20.219 RE1.1@93,23.857
NetRCLK3_1: RCLK3.1 RCLK5.2 RV_FREQ.3 | length 8.6
  Bottom Layer w0.65: RCLK5.2 65.169,33.647 RCLK3.1 65.209,30.75 RV_FREQ.3
NetRCLK3_2: RCLK3.2 RCLK4.1 | length 3.8
  Bottom Layer w0.65: RCLK4.1 59.312,30.79 RCLK3.2
NetRE1_2: pad.32 pad.33 pad.34 RE1.2 UE2.3 UE3.3 | length 33.8
  Top Layer w0.65: pad.34 98.5,25 99.5,24 pad.32
  Bottom Layer w0.65: UE3.3 93.08,36.58 91,34.5 91,27.5 92,26.5 RE1.2 95.5,26.5 97,25 pad.34 ; pad.32 UE2.3
NetRR3_2: RR3.2 RV_GAIN.1 UR2.6 | length 34.6
  Bottom Layer w0.65: RR3.2 57.5,80.5 58.5,81.5 ; RV_GAIN.1 53.42,84.58 54,84 55.5,82.5 57.5,82.5 58.5,81.5 ; UR2.6 60.27,69.23 59,70.5 59,81 58.5,81.5
NetRV_OFFSET_2: RV_OFFSET.2 UR2.5 | length 25.2
  Bottom Layer w0.65: RV_OFFSET.2 49.96,54.04 52,52 55,52 63.81,60.81 UR2.5
NetU1_10: U1.10 U2.9 | length 58.7
  Bottom Layer w0.65: U2.9 98.5,72.78 98.5,57.5 101.5,54.5 122.5,54.5 125,57 125,63 126.8,64.8 U1.10
NetUC1_5: UC1.5 UC1.6 | length 2.5
  Bottom Layer w0.65: UC1.5 UC1.6
NetUE1_1: UE1.1 UE2.1 | length 4
  Bottom Layer w0.65: UE1.1 110.32,31.76 UE2.1
NetUE1_13: UE1.13 UE2.5 | length 20.3
  Bottom Layer w0.65: UE1.13 108,28.8 108,23 112.08,18.92 UE2.5
NetUE2_2: pad.29 pad.30 pad.31 UE2.2 UE3.1 | length 21.9
  Top Layer w0.65: pad.30 104.5,27.5 105.5,26.5 pad.31
  Bottom Layer w0.65: UE3.1 93.5,30 96,27.5 pad.30 ; pad.31@110.54,26.54 UE2.2
NetUE2_6: UE2.6 UE3.4 | length 47.7
  Bottom Layer w0.65: UE3.4@93.62,39.04 92.54,39.04 89,35.5 89,24 90,23 90,18 91.62,16.38 UE2.6
NetUF1_12: UF1.12 UF2.14 | length 38.1
  Bottom Layer w0.65: UF1.12 30,14.88 30,8.5 32,6.5 39.5,6.5 42,9 42,20.234 UF2.14
RAMP: J_Out_Rampa.2 LED_RED.1 RAMP.1 UC1.2 | length 35.2
  Bottom Layer w0.65: RAMP.1 66,90 72.5,90 74,88.5 J_Out_Rampa.2 80.5,86 ; LED_RED.1 78,83.5 80.5,86 ; UC1.2@81.167,85.333 UC1.2 81,85.911 81,86 80.5,86
RESET: pad.58 pad.80 pad.81 RC1.2 RESET.1 U1.7 U1.15 UE3.6 | length 63.4
  Top Layer w0.65: pad.81 95.5,50.5 100,55 pad.58
  Bottom Layer w0.65: RESET.1 91.5,54 pad.81 95.5,45 94.7,44.2 UE3.6 ; pad.58 107.5,56.5 115.643,64.643 RC1.2 117.657,64.8 U1.7 122.3,64.8 124.5,67 124.5,73.88 U1.15
V_JOY: pad.84 pad.85 pad.86 pad.87 R666.2 UC1.3 Vx.1 | length 56.7
  Top Layer w0.65: pad.86@91,73 pad.86 97,79.5 pad.87
  Bottom Layer w0.65: UC1.3 83.207,82.793 84.5,81.5 84.5,79.5 86.5,77.5 86.5,76.5 ; R666.2 85.54,97.04 86.6,98.1 93.9,98.1 pad.87 ; Vx.1 86.5,76.5 ; pad.86 88,76.5 86.5,76.5
pads on no net: J1.2 J1.4 J2.4 J2.5 UE1.2 UE1.12 UE2.8 UE2.10 UE2.12 UE3.8 UE3.11 UF1.1 UF1.2 UF1.3 UF1.4 UF1.5 UF1.6 UF1.7 UF1.9 UF1.10 UF1.11 UF2.1 UF2.2 UF2.3 UF2.4 UF2.5 UF2.6 UF2.7 UF2.9 UF2.10 UF2.11 UR1.5 UR1.6 UR1.7 UR2.1 UR2.2 UR2.3

## Silkscreen, mask and mechanical layers (free items; w line width, h text height)
Top Overlay:
  text "Vx" at 108.5,97.5 h0.8 r90
  text "+5V" at 111,97 h0.8 r90
  text "GND" at 113.5,97 h0.8 r90
  text "Electronica III - TP2 - Grupo 3" at 193.5,80.5 h1.52 r270
  text "+9V" at 11.183,54.819 h0.8
  text "Alan - Guidin - Arielito - Tomatin" at 189,51.5 h1.52 r270
  text "GND" at 11.183,49.739 h0.8
  text "-9V" at 11.183,44.659 h0.8
Mechanical 1:
  lines w0.254: 0,0 200,0 200,100 0,100 0,0